# Altium PCB ParCar.PcbDoc
Units mm, origin at the board's own origin, x right, y up, seen from the top; angles counter-clockwise.
Board outline 20.07 x 42.67 mm, 2 copper layers (Top Layer, Bottom Layer); 27 components, 18 nets, 107 pads, 7 vias.
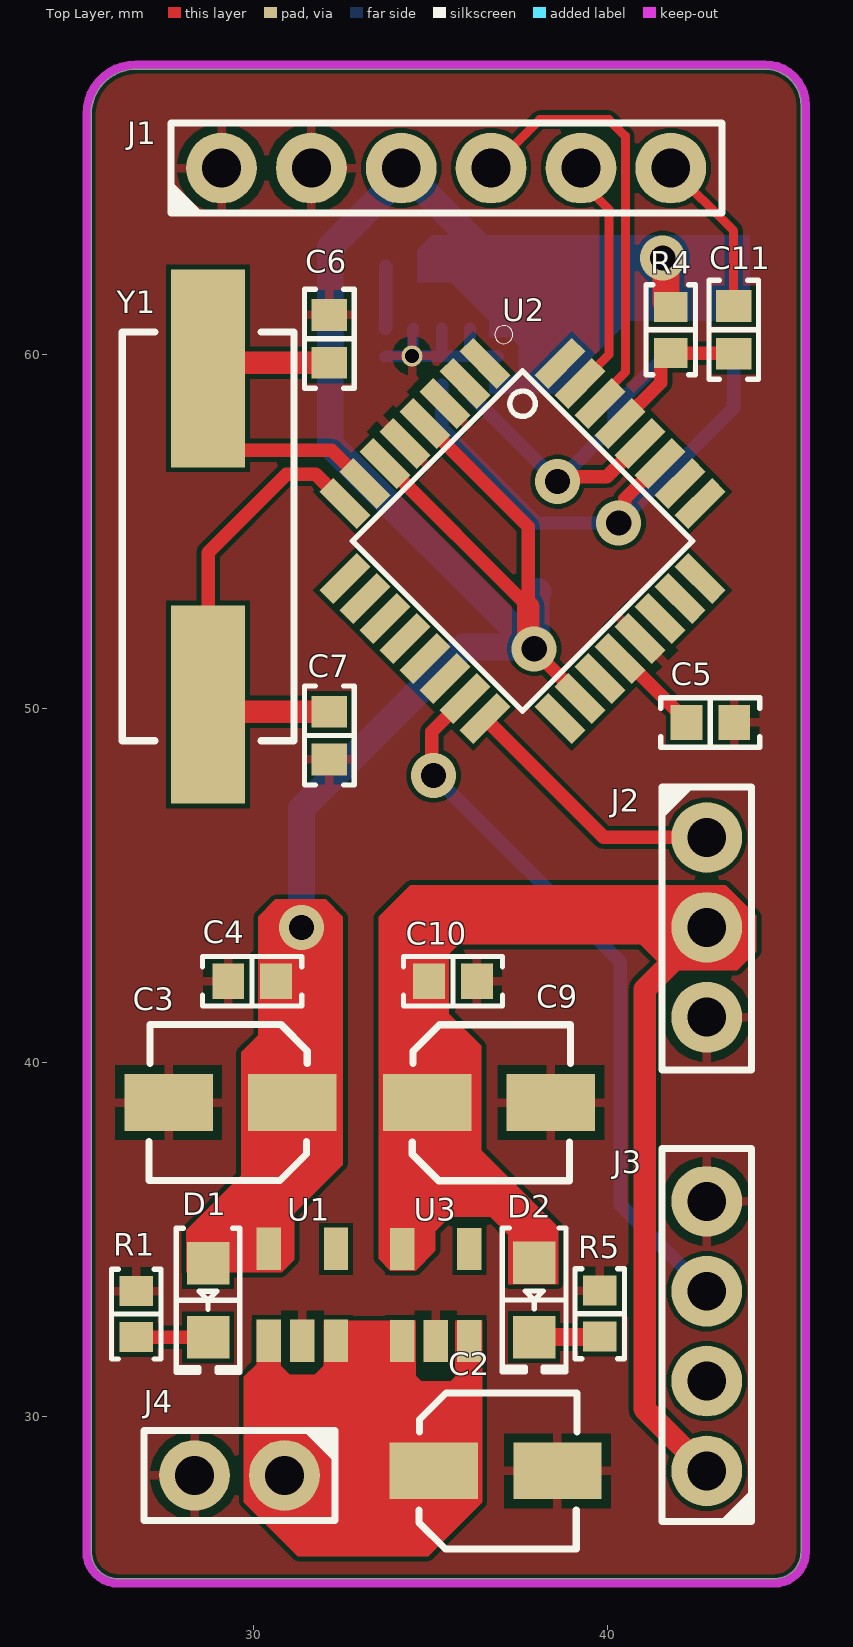
[diagram p0: Top Layer view]
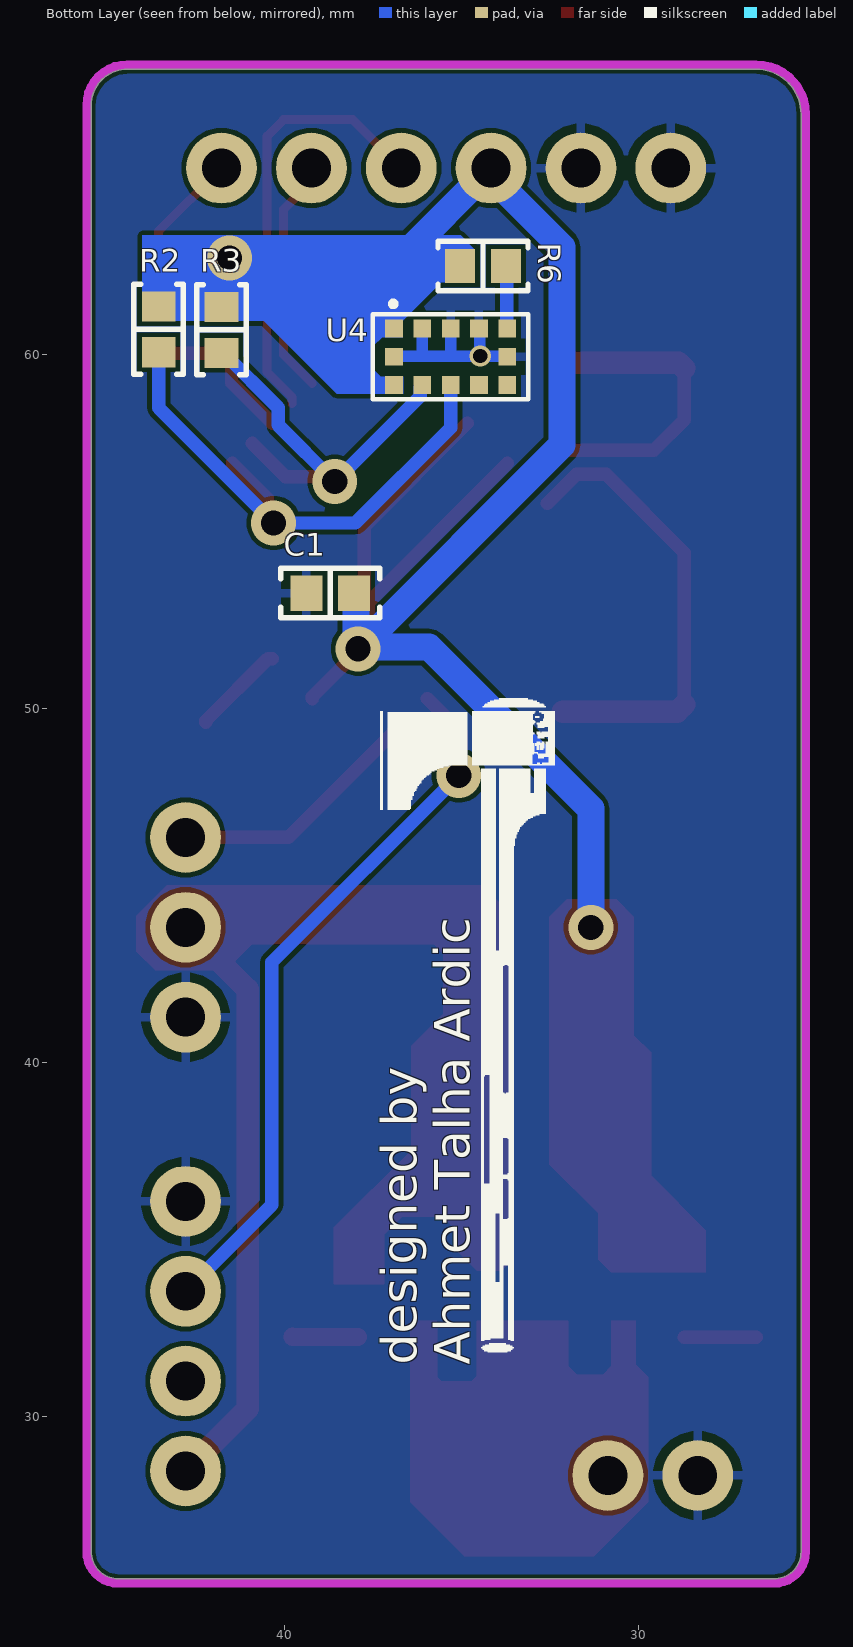
[diagram p1: Bottom Layer view, seen from below]
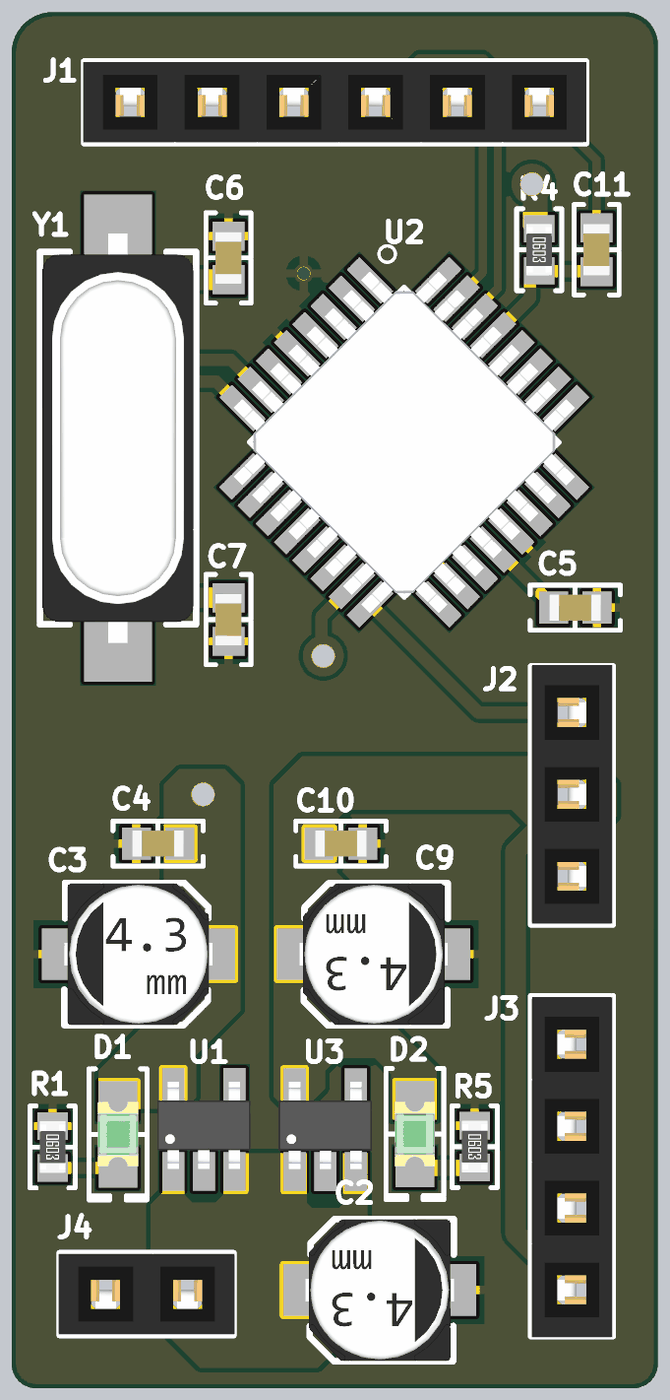
[diagram p2: 3D render of the assembled board from above, using the file's embedded part models]
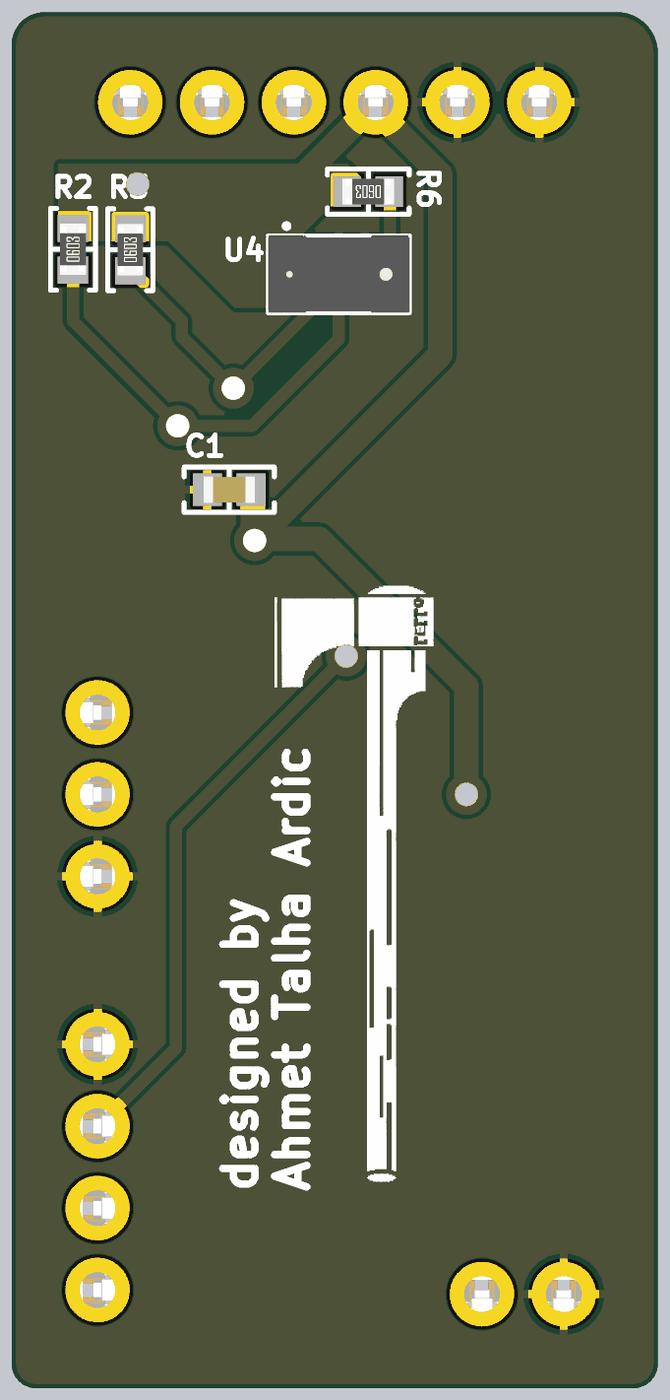
[diagram p3: 3D render of the assembled board from below, using the file's embedded part models]

## Layer stack, top to bottom
Top Solder: solder mask 0.0102, Solder Resist, Dk 3.5
Top Layer: signal copper 0.0356
Dielectric 1: dielectric 0.32, FR-4, Dk 4.8
Bottom Layer: signal copper 0.0356
Bottom Solder: solder mask 0.0102, Solder Resist, Dk 3.5

## Board outline
26.162,25.4 cw(c26.162,26.162) 25.4,26.162 25.4,66.802 cw(c26.67,66.802) 26.67,68.072 44.45,68.072 cw(c44.45,67.056) 45.466,67.056 45.466,26.162 cw(c44.704,26.162) 44.704,25.4

## Design rules (kind name [scope] priority, off if disabled: settings)
Clearance [All] p1: gap=0.127 ignorepadtopadclearanceinfootprint=TRUE
MinimumSolderMaskSliver [All] p1: minsoldermaskwidth=0
PolygonConnect [All] p1: connectstyle=Relief reliefconductorwidth=0.254 reliefentries=4 polygonreliefangle="90 Angle" airgapwidth=0.254
RoutingVias [All] p1: holewidth=0.711 width=1.27 viastyle="Through Hole" minholewidth=0.711 minwidth=1.27 maxholewidth=0.711 maxwidth=1.27
SilkToSilkClearance [All] p1: silktosilkclearance=0
SilkToSolderMaskClearance [IsPad] p1: minsilkscreentomaskgap=0 clearancetoexposedcopper=TRUE
SolderMaskExpansion SolderMaskExpansion_Via [IsVia] p1: expansion=0.102 istentingtop=TRUE
SolderMaskExpansion [All] p2: expansion=0.102 istentingtop=FALSE
Width [All] p1: maxlimit=1.27 minlimit=0.254 preferedwidth=0.254
27 further rules are at their usual default settings.

## Components (designator, comment, footprint, x,y, rotation, side; value= is the part's Value field where it differs from the comment)
C1 "0.1µF" "CAP 0603_1608" 38.71,53.264 r180 bottom
C2 "10 µF" "CAP ALSMD 4.3MM H5.4MM" 36.83,28.448 r0 top
C3 "10 µF" "CAP ALSMD 4.3MM H5.4MM" 29.337,38.862 r180 top
C4 "0.1µF" "CAP 0603_1608" 29.947,42.291 r0 top
C5 "0.1µF" "CAP 0603_1608" 42.901,49.606 r180 top
C6 "20 pF" "CAP 0603_1608" 32.131,60.452 r270 top
C7 "20 pF" "CAP 0603_1608" 32.131,49.236 r90 top
C9 "10 µF" "CAP ALSMD 4.3MM H5.4MM" 36.644,38.862 r0 top
C10 "0.1µF" "CAP 0603_1608" 35.625,42.291 r180 top
C11 "0.1µF" "CAP 0603_1608" 43.561,60.706 r270 top
D1 "Green" "LED 0805_2012 GREEN" 28.702,33.274 r270 top
D2 "Green" "LED 0805_2012 GREEN" 37.922,33.283 r270 top
J1 "M20-7820642" "HARWIN M20-7820645" 35.433,65.278 r90 top
J2 "M20-7820342" "HARWIN M20-7820345" 42.799,43.815 r0 top
J3 "M20-7820442" "HARWIN M20-7820445" 42.799,32.258 r180 top
J4 "M20-7820242" "HARWIN M20-7820245" 29.591,28.321 r270 top
R1 "10 kOhms" "RES 0603_1608" 26.67,32.883 r270 top
R2 "4.7 kOhms" "RES 0603_1608" 43.561,60.721 r90 bottom
R3 "4.7 kOhms" "RES 0603_1608" 41.783,60.706 r90 bottom
R4 "10 kOhms" "RES 0603_1608" 41.783,60.706 r270 top
R5 "10 kOhms" "RES 0603_1608" 39.776,32.893 r270 top
R6 "10 kOhms" "RES 0603_1608" 34.392,62.509 r0 bottom
U1 "PMIC-MIC5205-3.3YMSTR(SOT23-5)" PMIC-MIC5205-3.3YMSTR(SOT23-5) 31.369,33.426 r0 top
U2 "ATMEGA328-AU" ATMEGA328-AU 37.592,54.737 r315 top
U3 "MIC5205-5.0YM5-TR" PMIC-MIC5205-3.3YMSTR(SOT23-5) 35.138,33.422 r0 top
U4 "VL53L0X" VL53L0X 35.306,59.944 r180 bottom
Y1 "8 MHz" "ABRACON ABLS" 28.702,54.864 r90 top

## Footprints (in the part's own frame and the unit in brackets; to place one, negate y for a bottom-side part, rotate by r counter-clockwise, add the part's x,y. Pads: shape width x height; smd on the part's side, far side on the other; paste and mask are expansions set on the pad)
"ABRACON ABLS" [mm] "Crystal, 2-Leads, Body 4.70x11.40mm, Pitch 8.80mm, IPC Medium Density"
  rect 5.6x2.1 smd: 1(-4.75,0) 2(4.75,0)
  silkscreen extent -5.77,-2.43 5.77,2.43, body extent -6.35,-2.35 6.35,2.35, height 4.2
ATMEGA328-AU [mm]
  rect 1.5x0.55 smd: 1(-4.3,2.8) 2(-4.3,2) 3(-4.3,1.2) 4(-4.3,0.4) 5(-4.3,-0.4) 6(-4.3,-1.2) 7(-4.3,-2) 8(-4.3,-2.8) 17(4.3,-2.8) 18(4.3,-2) 19(4.3,-1.2) 20(4.3,-0.4) 21(4.3,0.4) 22(4.3,1.2) 23(4.3,2) 24(4.3,2.8)
  rect 0.55x1.5 smd: 9(-2.8,-4.3) 10(-2,-4.3) 11(-1.2,-4.3) 12(-0.4,-4.3) 13(0.4,-4.3) 14(1.2,-4.3) 15(2,-4.3) 16(2.8,-4.3) 25(2.8,4.3) 26(2,4.3) 27(1.2,4.3) 28(0.4,4.3) 29(-0.4,4.3) 30(-1.2,4.3) 31(-2,4.3) 32(-2.8,4.3)
  silkscreen extent -4.75,-3.4 3.4,4, body extent -4.5,-4.5 4.5,4.5, height 1.19
"CAP 0603_1608" [mm] "Chip Capacitor, 2-Leads, Body 1.60x0.80mm, IPC Medium Density"
  rect 0.9x1 smd: 1(-0.675,0) 2(0.675,0)
  silkscreen extent -1.4,-0.7 1.4,0.7, body extent -0.8,-0.41 0.8,0.41, height 0.82
"CAP ALSMD 4.3MM H5.4MM" [mm] "Aluminum Electrolytic Capacitor, Body 4.30x4.30x5.40mm, IPC Low Density"
  rect 2.5x1.6 smd: 1(-1.75,0) 2(1.75,0)
  silkscreen extent -2.17,-2.21 2.3,2.2, body extent -2.3,-2.2 2.3,2.2, height 5.4
"HARWIN M20-7820245" [mm] "2.54mm DIL PC TAIL PIN HEADER ASSEMBLY"
  round 2 hole 1.1: 1(0,1.27) 2(0,-1.27)
  silkscreen extent -1.27,-2.7 1.27,2.73, body extent -1.25,-2.74 1.25,2.74, height 8.5
"HARWIN M20-7820345" [mm] "2.54mm DIL PC TAIL PIN HEADER ASSEMBLY"
  round 2 hole 1.1: 1(0,2.54) 2(0,0) 3(0,-2.54)
  silkscreen extent -1.27,-4.03 1.27,4, body extent -1.25,-4.01 1.25,4.01, height 8.5
"HARWIN M20-7820445" [mm] "2.54mm DIL PC TAIL PIN HEADER ASSEMBLY"
  round 2 hole 1.1: 1(0,3.81) 2(0,1.27) 3(0,-1.27) 4(0,-3.81)
  silkscreen extent -1.27,-5.3 1.27,5.27, body extent -1.25,-5.28 1.25,5.28, height 8.5
"HARWIN M20-7820645" [mm] "2.54mm DIL PC TAIL PIN HEADER ASSEMBLY"
  round 2 hole 1.1: 1(0,6.35) 2(0,3.81) 3(0,1.27) 4(0,-1.27) 5(0,-3.81) 6(0,-6.35)
  silkscreen extent -1.27,-7.8 1.27,7.81, body extent -1.25,-7.82 1.25,7.82, height 8.5
"LED 0805_2012 GREEN" [mm] "Chip Diode, 2-Leads, Body 2.00x1.25mm, IPC Medium Density"
  rect 1.2x1.2 smd: 1(-1.05,0) 2(1.05,0)
  silkscreen extent -2.03,-0.9 2.03,0.9, body extent -1,-0.62 1,0.63, height 0.9
PMIC-MIC5205-3.3YMSTR(SOT23-5) [mm]
  rect 0.69x1.2 smd: 1(-0.95,-1.3) 2(0,-1.3) 3(0.95,-1.3) 4(0.95,1.3) 5(-0.95,1.3)
  body extent -1.45,-1.22 1.45,1.48, height 1.45
"RES 0603_1608" [mm] "Chip Resistor, 2-Leads, Body 1.60x0.80mm, IPC Medium Density"
  rect 0.85x0.95 smd: 1(-0.65,0) 2(0.65,0)
  silkscreen extent -1.27,-0.7 1.27,0.7, body extent -0.8,-0.4 0.8,0.4, height 0.45
VL53L0X [mm]
  rect 0.5x0.5 smd: 1(-1.6,0.8) 2(-0.8,0.8) 3(0,0.8) 4(0.8,0.8) 5(1.6,0.8) 6(1.6,0) 7(1.6,-0.8) 8(0.8,-0.8) 9(0,-0.8) 10(-0.8,-0.8) 11(-1.6,-0.8) 12(-1.6,0)
  silkscreen extent -2.2,-1.2 2.2,1.57, body extent -2.2,-1.2 2.2,1.2, height 1.06

## Part data
C1 C4 C5 C10 C11: library part 06036C104JAT2A, "CAP CER 0.1UF 6.3V X7R 0603", Device Package="0603 (1608 Metric)", manufacturer="AVX Corporation", Operating Temperature="-55°C ~ 125°C", Supplier Part Number 1=478-06036C104JAT2ACT-ND, Temperature Coefficient=X7R, Tolerance=±5%, Voltage - Rated=6.3V, Applications="General Purpose", Capacitance=0.1µF, componentlink1description=Datasheet, componentlink1url=http://datasheets.avx.com/X7RDielectric.pdf, componentlink2description="DigiKey Link", componentlink2url=http://digikey.com/product-detail/en/avx-corporation/06036C104JAT2A/478-06036C104JAT2ACT-ND/11570344, lastupdated="2.09.2020 01:02:55", Lifecycle Status=Active, Minimum Order=1, Mounting Type="Surface Mount, MLCC", Package / Case="0603 (1608 Metric)", packaging=TapeAndReel, Part Number=06036C104JAT2A, Part Status=Active, partid=27379, price=0.01, series=-, Supplier 1=DigiKey
C2 C3 C9: library part UWX1C100MCL1GB, "CAP ALUM 10UF 20% 16V SMD", Device Package="Radial, Can - SMD", Lifetime @ Temp.="2000 Hrs @ 85°C", manufacturer=Nichicon, Operating Temperature="-40°C ~ 85°C", Ripple Current @ High Frequency="34.5 mA @ 10 kHz", Ripple Current @ Low Frequency="23 mA @ 120 Hz", Supplier Part Number 1=493-2100-1-ND, Tolerance=±20%, Voltage - Rated="16 V", Applications="General Purpose", Capacitance="10 µF", componentlink1description=Datasheet, componentlink1url=https://products.nichicon.co.jp/en/pdf/XJA043/e-uwx.pdf, componentlink2description="DigiKey Link", componentlink2url=https://www.digikey.com/en/products/detail/nichicon/UWX1C100MCL1GB/589841, Height - Seated (Max)="0.213\" (5.40mm)", lastupdated="14.05.2023 20:15:39", Lifecycle Status=Active, Minimum Order=1, Mounting Type="Surface Mount", Package / Case="Radial, Can - SMD", packaging=TapeAndReel, Part Number=UWX1C100MCL1GB, Part Status=Active, partid=7030, Polarization=Polar, price=0.06, series=UWX, Size / Dimension="0.157\" Dia (4.00mm)", Supplier 1=DigiKey, Surface Mount Land Size="0.169\" L x 0.169\" W (4.30mm x 4.30mm)"
C6 C7: library part C0603C200G8HAC7867, "CAP CER 20PF 10V X8R 0603", Device Package="0603 (1608 Metric)", manufacturer=KEMET, Operating Temperature="-55°C ~ 150°C", Supplier Part Number 1=399-C0603C200G8HAC7867CT-ND, Temperature Coefficient=X8R, Tolerance=±2%, Voltage - Rated=10V, Applications="General Purpose", Capacitance="20 pF", componentlink1description=Datasheet, componentlink1url=https://api.kemet.com/component-edge/download/datasheet/C0603C200G8HAC7867.pdf, componentlink2description="DigiKey Link", componentlink2url=https://www.digikey.com/en/products/detail/kemet/C0603C200G8HAC7867/7946222, Features="Low ESL, High Temperature", lastupdated="14.05.2023 19:10:00", Lifecycle Status=Active, Minimum Order=1, Mounting Type="Surface Mount, MLCC", Package / Case="0603 (1608 Metric)", packaging=TapeAndReel, Part Number=C0603C200G8HAC7867, Part Status=Active, partid=35714, price=0.01, series="SMD Comm X8R HT150C", Size / Dimension="0.063\" L x 0.031\" W (1.60mm x 0.80mm)", Supplier 1=DigiKey, Thickness (Max)="0.034\" (0.87mm)"
D1 D2: library part SML-LX0805GC-TR, "LED GREEN CLEAR SMD", Current - Test=20mA, Device Package="0805 (2012 Metric)", Lens Color=Colorless, manufacturer="Lumex Opto/Components Inc.", Millicandela Rating=10mcd, Supplier Part Number 1=67-2188-1-ND, Voltage - Forward (Vf) (Typ)=2.2V, Color=Green, componentlink1description=Datasheet, componentlink1url=https://www.lumex.com/content/files/ProductAttachment/SML-LX0805GC-TR.pdf, componentlink2description="DigiKey Link", componentlink2url=https://www.digikey.com/en/products/detail/lumex-opto-components-inc/SML-LX0805GC-TR/515786, Configuration=Standard, Height (Max)=1.20mm, lastupdated="14.05.2023 20:33:17", Lens Size="1.40mm x 1.25mm", Lens Style="Rectangle with Flat Top", Lens Transparency=Clear, Lifecycle Status=Active, Minimum Order=1, Mounting Type="Surface Mount", Package / Case="0805 (2012 Metric)", packaging=TapeAndReel, Part Number=SML-LX0805GC-TR, Part Status=Active, partid=242, price=0.05, series=-, Size / Dimension="2.00mm L x 1.25mm W", Supplier 1=DigiKey, Viewing Angle=140°, Wavelength - Peak=565nm
J1: "CONN RCPT 6POS 0.1 GOLD PCB", Current Rating (Amps)=3A, manufacturer="Harwin Inc.", Material Flammability Rating="UL94 V-0", Operating Temperature="-40°C ~ 105°C", Supplier Part Number 1=952-1808-ND, Insulation Color=Black, componentlink1description=Datasheet, componentlink1url=https://cdn.harwin.com/pdfs/C001XX_M20_Series_Connectors.pdf, componentlink2description="DigiKey Link", componentlink2url=https://www.digikey.com/en/products/detail/harwin-inc/M20-7820642/3727776, Connector Type=Receptacle, Contact Finish - Mating=Gold, Contact Finish - Post=Tin, Contact Finish Thickness - Mating=Flash, Contact Length - Post="0.118\" (3.00mm)", Contact Type="Female Socket", Fastening Type=Push-Pull, lastupdated="21.09.2022 18:58:09", Lifecycle Status=Active, Mated Stacking Heights="11.04mm, 12.63mm", Minimum Order=1, Mounting Type="Through Hole", Number of Positions=6, Number of Positions Loaded=All, Number of Rows=1, packaging=Tube, Part Number=M20-7820642, Part Status=Active, Pitch - Mating="0.100\" (2.54mm)", price=0.55, series=M20, Style="Board to Board or Cable", Supplier 1=DigiKey, Termination=Solder, Insulation Height="0.335\" (8.51mm)"
J2: "CONN RCPT 3POS 0.1 GOLD PCB", Current Rating (Amps)=3A, manufacturer="Harwin Inc.", Material Flammability Rating="UL94 V-0", Operating Temperature="-40°C ~ 105°C", Supplier Part Number 1=952-1783-ND, Insulation Color=Black, componentlink1description=Datasheet, componentlink1url=https://cdn.harwin.com/pdfs/Harwin_PC_Connectors_M20.pdf, componentlink2description="DigiKey Link", componentlink2url=https://www.digikey.com/en/products/detail/harwin-inc/M20-7820342/3727752, Connector Type=Receptacle, Contact Finish - Mating=Gold, Contact Finish - Post=Tin, Contact Finish Thickness - Mating=Flash, Contact Length - Post="0.118\" (3.00mm)", Contact Type="Female Socket", Fastening Type=Push-Pull, lastupdated="21.09.2022 18:55:13", Lifecycle Status=Active, Mated Stacking Heights="11.04mm, 12.63mm", Minimum Order=1, Mounting Type="Through Hole", Number of Positions=3, Number of Positions Loaded=All, Number of Rows=1, packaging=Tube, Part Number=M20-7820342, Part Status=Active, Pitch - Mating="0.100\" (2.54mm)", price=0.42, series=M20, Style="Board to Board or Cable", Supplier 1=DigiKey, Termination=Solder, Insulation Height="0.335\" (8.51mm)"
J3: "CONN RCPT 4POS 0.1 GOLD PCB", Current Rating (Amps)=3A, manufacturer="Harwin Inc.", Material Flammability Rating="UL94 V-0", Operating Temperature="-40°C ~ 105°C", Supplier Part Number 1=952-1791-ND, Insulation Color=Black, componentlink1description=Datasheet, componentlink1url=https://cdn.harwin.com/pdfs/Harwin_PC_Connectors_M20.pdf, componentlink2description="DigiKey Link", componentlink2url=https://www.digikey.com/en/products/detail/harwin-inc/M20-7820442/3727760, Connector Type=Receptacle, Contact Finish - Mating=Gold, Contact Finish - Post=Tin, Contact Finish Thickness - Mating=Flash, Contact Length - Post="0.118\" (3.00mm)", Contact Type="Female Socket", Fastening Type=Push-Pull, lastupdated="21.09.2022 18:57:11", Lifecycle Status=Active, Mated Stacking Heights="11.04mm, 12.63mm", Minimum Order=1, Mounting Type="Through Hole", Number of Positions=4, Number of Positions Loaded=All, Number of Rows=1, packaging=Tube, Part Number=M20-7820442, Part Status=Active, Pitch - Mating="0.100\" (2.54mm)", price=0.45, series=M20, Style="Board to Board or Cable", Supplier 1=DigiKey, Termination=Solder, Insulation Height="0.335\" (8.51mm)"
J4: "CONN RCPT 2POS 0.1 GOLD PCB", Current Rating (Amps)=3A, manufacturer="Harwin Inc.", Material Flammability Rating="UL94 V-0", Operating Temperature="-40°C ~ 105°C", Supplier Part Number 1=952-1775-ND, Insulation Color=Black, componentlink1description=Datasheet, componentlink1url=https://cdn.harwin.com/pdfs/C001XX_M20_Series_Connectors.pdf, componentlink2description="DigiKey Link", componentlink2url=https://www.digikey.com/en/products/detail/harwin-inc/M20-7820242/3727744, Connector Type=Receptacle, Contact Finish - Mating=Gold, Contact Finish - Post=Tin, Contact Finish Thickness - Mating=Flash, Contact Length - Post="0.118\" (3.00mm)", Contact Type="Female Socket", Fastening Type=Push-Pull, lastupdated="21.09.2022 18:53:47", Lifecycle Status=Active, Mated Stacking Heights="11.04mm, 12.63mm", Minimum Order=1, Mounting Type="Through Hole", Number of Positions=2, Number of Positions Loaded=All, Number of Rows=1, packaging=Tube, Part Number=M20-7820242, Part Status=Active, Pitch - Mating="0.100\" (2.54mm)", price=0.38, series=M20, Style="Board to Board or Cable", Supplier 1=DigiKey, Termination=Solder, Insulation Height="0.335\" (8.51mm)"
R1 R5 R6: library part ERJ-P03J103V, "RES SMD 10K OHM 5% 1/5W 0603", Device Package="0603 (1608 Metric)", manufacturer="Panasonic Electronic Components", Operating Temperature="-55°C ~ 155°C", Power (Watts)="0.2W, 1/5W", Ratings=AEC-Q200, Supplier Device Package=0603, Supplier Part Number 1=P16032CT-ND, Temperature Coefficient=±200ppm/°C, Tolerance=±5%, componentlink1description=Datasheet, componentlink1url=https://industrial.panasonic.com/cdbs/www-data/pdf/RDO0000/AOA0000C331.pdf, componentlink2description="DigiKey Link", componentlink2url=https://www.digikey.com/en/products/detail/panasonic-electronic-components/ERJ-P03J103V/3982673, Composition="Thick Film", Features="Automotive AEC-Q200, Pulse Withstanding", Height - Seated (Max)="0.022\" (0.55mm)", lastupdated="14.05.2023 19:35:14", Lifecycle Status=Active, Minimum Order=1, Number of Terminations=2, Package / Case="0603 (1608 Metric)", packaging=TapeAndReel, Part Number=ERJ-P03J103V, Part Status=Active, partid=8170, price=0.03, Resistance="10 kOhms", series=ERJ-P03, Size / Dimension="0.063\" L x 0.031\" W (1.60mm x 0.80mm)", Supplier 1=DigiKey
R2 R3: library part ERJ-3EKF4701V, "RES SMD 4.7K OHM 1% 1/10W 0603", Device Package="0603 (1608 Metric)", manufacturer="Panasonic Electronic Components", Operating Temperature="-55°C ~ 155°C", Power (Watts)="0.1W, 1/10W", Ratings=AEC-Q200, Supplier Device Package=0603, Supplier Part Number 1=P4.70KHCT-ND, Temperature Coefficient=±100ppm/°C, Tolerance=±1%, componentlink1description=Datasheet, componentlink1url=https://industrial.panasonic.com/cdbs/www-data/pdf/RDA0000/AOA0000C304.pdf, componentlink2description="DigiKey Link", componentlink2url=https://www.digikey.com/en/products/detail/panasonic-electronic-components/ERJ-3EKF4701V/1746419, Composition="Thick Film", Features="Automotive AEC-Q200", Height - Seated (Max)="0.022\" (0.55mm)", lastupdated="14.05.2023 19:35:20", Lifecycle Status=Active, Minimum Order=1, Number of Terminations=2, Package / Case="0603 (1608 Metric)", packaging=TapeAndReel, Part Number=ERJ-3EKF4701V, Part Status=Active, partid=5645, price=0.01, Resistance="4.7 kOhms", series=ERJ-3EK, Size / Dimension="0.063\" L x 0.031\" W (1.60mm x 0.80mm)", Supplier 1=DigiKey
R4: library part RCS060310K0JNEA, "RES SMD 10K OHM 5% 1/4W 0603", Device Package="0603 (1608 Metric)", manufacturer="Vishay Dale", Operating Temperature="-55°C ~ 155°C", Power (Watts)="0.25W, 1/4W", Ratings=AEC-Q200, Supplier Device Package=0603, Supplier Part Number 1=541-2817-1-ND, Temperature Coefficient=±200ppm/°C, Tolerance=±5%, componentlink1description=Datasheet, componentlink1url=http://www.vishay.com/docs/20065/rcse3.pdf, componentlink2description="DigiKey Link", componentlink2url=https://www.digikey.com/en/products/detail/vishay-dale/RCS060310K0JNEA/5866963, Composition="Thick Film", Features="Automotive AEC-Q200, Pulse Withstanding", Height - Seated (Max)="0.020\" (0.50mm)", lastupdated="14.05.2023 19:35:21", Lifecycle Status=Active, Minimum Order=1, Number of Terminations=2, Package / Case="0603 (1608 Metric)", packaging=TapeAndReel, Part Number=RCS060310K0JNEA, Part Status=Active, partid=5383, price=0.01, Resistance="10 kOhms", series="RCS e3", Size / Dimension="0.061\" L x 0.033\" W (1.55mm x 0.85mm)", Supplier 1=DigiKey
U1: "Linear Voltage Regulator IC 1 Output 150mA SOT-23-5"
U2: "AVR AVRÂ® ATmega Microcontroller IC 8-Bit 20MHz 32KB (16K x 16) FLASH 32-TQFP (7x7)"
U3: "Linear Voltage Regulator IC Positive Fixed 1 Output 150mA SOT-23-5"
U4: "VL53L0X - Light, 3D Time-of-Flight _ToF_"
Y1: library part ABLS-8.000MHZ-SD7Y-T, "CRYSTAL 8.0000MHZ 18PF SMD", ESR (Equivalent Series Resistance)="80 Ohms", Frequency Stability=±30ppm, Frequency Tolerance=±15ppm, Load Capacitance=18pF, manufacturer="Abracon LLC", Operating Mode=Fundamental, Operating Temperature="-40°C ~ 85°C", Package / Case=HC-49/US, Supplier Part Number 1=535-14365-2-ND, componentlink1description=Datasheet, componentlink1url=https://abracon.com/Resonators/abls.pdf, componentlink2description="DigiKey Link", componentlink2url=https://www.digikey.com/en/products/detail/abracon-llc/ABLS-8-000MHZ-SD7Y-T/8581989, Frequency="8 MHz", Height - Seated (Max)="0.165\" (4.20mm)", lastupdated="14.05.2023 20:37:14", Lifecycle Status=Active, Minimum Order=1, Mounting Type="Surface Mount", packaging=CutTape, Part Number=ABLS-8.000MHZ-SD7Y-T, Part Status=Active, partid=25, price=0.27, series=ABLS, Size / Dimension="0.449\" L x 0.185\" W (11.40mm x 4.70mm)", Supplier 1=DigiKey, Type="MHz Crystal"

## Via types
v1: diameter 1.27, hole 0.711, Top Layer to Bottom Layer, tented both sides, 6 vias
v2: diameter 0.6, hole 0.4, Top Layer to Bottom Layer, tented both sides, 1 vias

## Nets (pads, with @x,y where several pads share a name; then routed paths per layer and width w, separated by ;. In a path a pad name is that pad's centre, name@x,y a point inside that pad or via, vN(x,y) a via of type N, cw(c..) or ccw(c..) an arc to the next point about the centre after c; other vN are vias at no path point)
3V3: C1.2 C3.1 C4.2 D1.1 J1.3 R2.2 R3.2 R4.1 R6.2 U1.5 U2.4 U2.6 U2.18 U4.1 U4.11 | length 55.6
  Top Layer w0.381: U2.6 37.752,52.88 37.752,55.143 U2.4 ; v1@37.752,51.859 v1(37.922,51.689) 37.922,51.634 39.218,50.338 U2.18
  Top Layer w0.635: v1@37.752,51.859 37.752,52.88
  Top Layer w0.762: v1(41.554,62.738) 41.652,62.641 41.652,61.487 41.689,61.45 41.689,61.4 41.733,61.356 R4.1
  Bottom Layer w0.381: C1.2@37.955,53.257 C1.2@37.988,53.289
  Bottom Layer w0.762: v1(31.344,43.815) 31.344,47.168 35.916,51.74 v1@37.871,51.74 ; C1.2@38.035,53.314 C1.2 37.978,53.208 37.978,51.745 v1(37.922,51.689) v1@37.871,51.74 ; v1(41.554,62.738) 36.703,62.738 J1.3 34.163,65.049 32.156,63.043 32.156,57.455 v1@37.871,51.74 ; R3.2 R3.2@41.791,61.363 ; R2.2@43.553,61.363 R2.2
5V: C9.1 C10.2 D2.1 J2.2 J3.1 U3.5 | length 16.8
  Top Layer w0.635: J3.1 41.046,30.201 41.046,42.062 J2.2
DTR: C11.1 J1.6 | length 4.6
  Top Layer w0.254: J1.6 43.561,63.5 C11.1
GND: C1.1 C2.2 C3.2 C4.1 C5.1 C6.1 C7.1 C9.2 C10.1 J1.1 J1.2 J2.3 J3.4 J4.2 R1.1 R5.1 U1.2 U2.3 U2.5 U2.21 U3.2 U4.2 U4.3 U4.4 U4.6 U4.12 | length 5.6
  Bottom Layer w0.33: U4.6 33.719,59.957 34.455,59.957 v2(34.468,59.969) ; U4.4 34.487,60.725 34.487,59.989 v2(34.468,59.969) ; U4.3 35.306,59.957 ; U4.2 36.106,59.963 36.1,59.957 ; U4.12 36.893,59.957 36.1,59.957 ; v2(34.468,59.969) 34.48,59.957 35.306,59.957 ; 35.306,59.957 36.1,59.957
NetC5_2: C5.2 U2.20 | length 2.7
  Top Layer w0.381: U2.20 40.468,51.414 42.226,49.656 C5.2
NetC6_2: C6.2 U2.7 Y1.2 | length 10.1
  Top Layer w0.381: Y1.2 28.702,58.157 29.562,57.298 32.203,57.298 U2.7
  Top Layer w0.635: Y1.2 28.865,59.777 C6.2
NetC7_2: C7.2 U2.8 Y1.1 | length 12.9
  Top Layer w0.381: Y1.1 28.702,54.407 30.912,56.617 31.753,56.617 U2.8
  Top Layer w0.635: Y1.1 28.905,49.911 C7.2
NetC11_2: C11.2 R4.2 U2.29 | length 4.4
  Top Layer w0.381: U2.29 41.498,59.209 41.498,59.822 41.733,60.056 R4.2 41.795,60.044 43.548,60.044 C11.2
NetD1_2: D1.2 R1.2 | length 2
  Top Layer w0.381: R1.2 28.693,32.233 D1.2
NetD2_2: D2.2 R5.2 | length 1.9
  Top Layer w0.508: D2.2 37.927,32.238 39.771,32.238 R5.2
NetR6_1: R6.1 U4.5 | length 1.8
  Bottom Layer w0.381: U4.5 33.724,60.762 33.724,62.492 R6.1
R_DATA: J3.3 U2.15 | length 20.4
  Top Layer w0.381: v1(35.077,48.108) 35.027,48.158 35.027,49.343 U2.15
  Bottom Layer w0.381: v1(35.077,48.108) 40.361,42.824 40.361,35.966 J3.3
RXI: J1.4 U2.30 | length 12.4
  Top Layer w0.254: J1.4 38.075,66.65 40.03,66.65 40.497,66.183 40.497,59.513 39.784,58.8 U2.30
SCL: R3.1 U2.28 U4.10 | length 11.5
  Top Layer w0.381: v1(38.583,56.413) 38.728,56.559 39.98,56.559 U2.28
  Bottom Layer w0.381: U4.10 36.166,59.084 36.166,58.83 v1(38.583,56.413) 40.186,58.017 40.186,58.509 41.733,60.056 R3.1
SDA: R2.1 U2.27 U4.9 | length 15.7
  Top Layer w0.381: v1(40.31,55.245) 40.48,55.415 40.48,55.928 U2.27
  Bottom Layer w0.381: U4.9 35.306,57.937 37.998,55.245 v1(40.31,55.245) 43.561,58.496 R2.1
T_DATA: J2.1 U2.16 | length 7.7
  Top Layer w0.381: U2.16 39.893,46.355 J2.1
TXO: J1.5 U2.31 | length 6.7
  Top Layer w0.254: U2.31 40.03,60.004 40.03,64.112 39.243,64.9 J1.5
VIN: C2.1 J4.1 U1.1 U1.3 U3.1 U3.3
pads on no net: J3.2 U1.4 U2.1 U2.2 U2.9 U2.10 U2.11 U2.12 U2.13 U2.14 U2.17 U2.19 U2.22 U2.23 U2.24 U2.25 U2.26 U2.32 U3.4 U4.7 U4.8

## Polygon pours and split planes (outlines as drawn)
GND on Top Layer "GND_L01_P000" (solid, remove dead copper, pour order 0): 26.162,25.4 cw(c26.162,26.162) 25.4,26.162 25.4,66.802 cw(c26.67,66.802) 26.67,68.072 44.45,68.072 cw(c44.45,67.056) 45.466,67.056 45.466,26.162 cw(c44.704,26.162) 44.704,25.4
GND on Bottom Layer "GND_L02_P001" (solid, remove dead copper, pour order 1): 26.162,25.4 cw(c26.162,26.162) 25.4,26.162 25.4,66.802 cw(c26.67,66.802) 26.67,68.072 44.45,68.072 cw(c44.45,67.056) 45.466,67.056 45.466,26.162 cw(c44.704,26.162) 44.704,25.4

## Keep-outs
Keep-Out Layer:
  lines w0.254: 25.273,26.162 ccw(c26.162,26.162) 26.162,25.273 44.704,25.273 ccw(c44.704,26.162) 45.593,26.162 45.593,67.056 ccw(c44.45,67.056) 44.45,68.199 26.67,68.199 ccw(c26.67,66.802) 25.273,66.802 25.273,26.162

## Other copper
Top Layer:
  region net 5V: 33.858,34.112 34.569,34.112 35.128,34.671 35.128,35.23 35.535,35.636 36.678,35.636 37.186,35.128 37.186,33.731 38.608,33.731 38.608,35.331 36.424,37.516 36.424,40.462 35.509,41.377 35.509,43.053 35.789,43.332 40.919,43.332 41.656,42.596 43.663,42.596 44.196,43.129 44.196,44.145 43.332,45.009 35.56,45.009 34.417,45.009 33.528,44.12 33.528,34.442
  region net 3V3: 28.092,34.061 30.785,34.061 31.14,34.417 31.14,35.738 32.512,37.109 32.512,44.12 32.029,44.602 30.607,44.602 30.124,44.12 30.124,40.767 29.642,40.284 29.642,36.805 28.092,35.255
  region net VIN: 29.718,27.559 31.242,26.035 34.925,26.035 36.449,27.559 36.449,32.69 35.687,32.69 35.687,31.115 35.56,30.988 34.727,30.988 34.569,31.145 34.569,32.69 33.909,32.69 33.884,32.715 33.858,32.69 31.979,32.69 31.979,31.42 31.725,31.166 31.013,31.166 30.759,31.42 30.759,32.69 30.074,32.69 30.074,31.471 29.718,31.115
Bottom Layer:
  region net 3V3: 40.589,60.96 44.018,60.96 44.018,63.373 39.065,63.373 35.027,63.373 34.62,62.967 34.62,62.052 35.568,62.052 36.656,60.964 36.656,60.494 37.245,60.494 37.49,60.249 37.49,59.588 37.287,59.385 36.652,59.385 36.652,58.903 38.532,58.903

## Silkscreen, mask and mechanical layers (free items; w line width, h text height)
Bottom Overlay:
  drawing of 8 lines, arcs and shapes, not listed
  text "designed by  / Ahmet Talha Ardic" at 34.765,31.45 h1 r270